# Altium PCB FC_PCB.PcbDoc (part 2 of 2)
Units mm, origin at the board's own origin, x right, y up, seen from the top; angles counter-clockwise.
Board outline 46 x 54 mm, 4 copper layers (Top Layer, GND, 3V3, Bottom Layer), stack 0.603 mm thick; 126 components, 94 nets, 458 pads, 139 vias.
Unrouted connection lines stored in the file: 5.
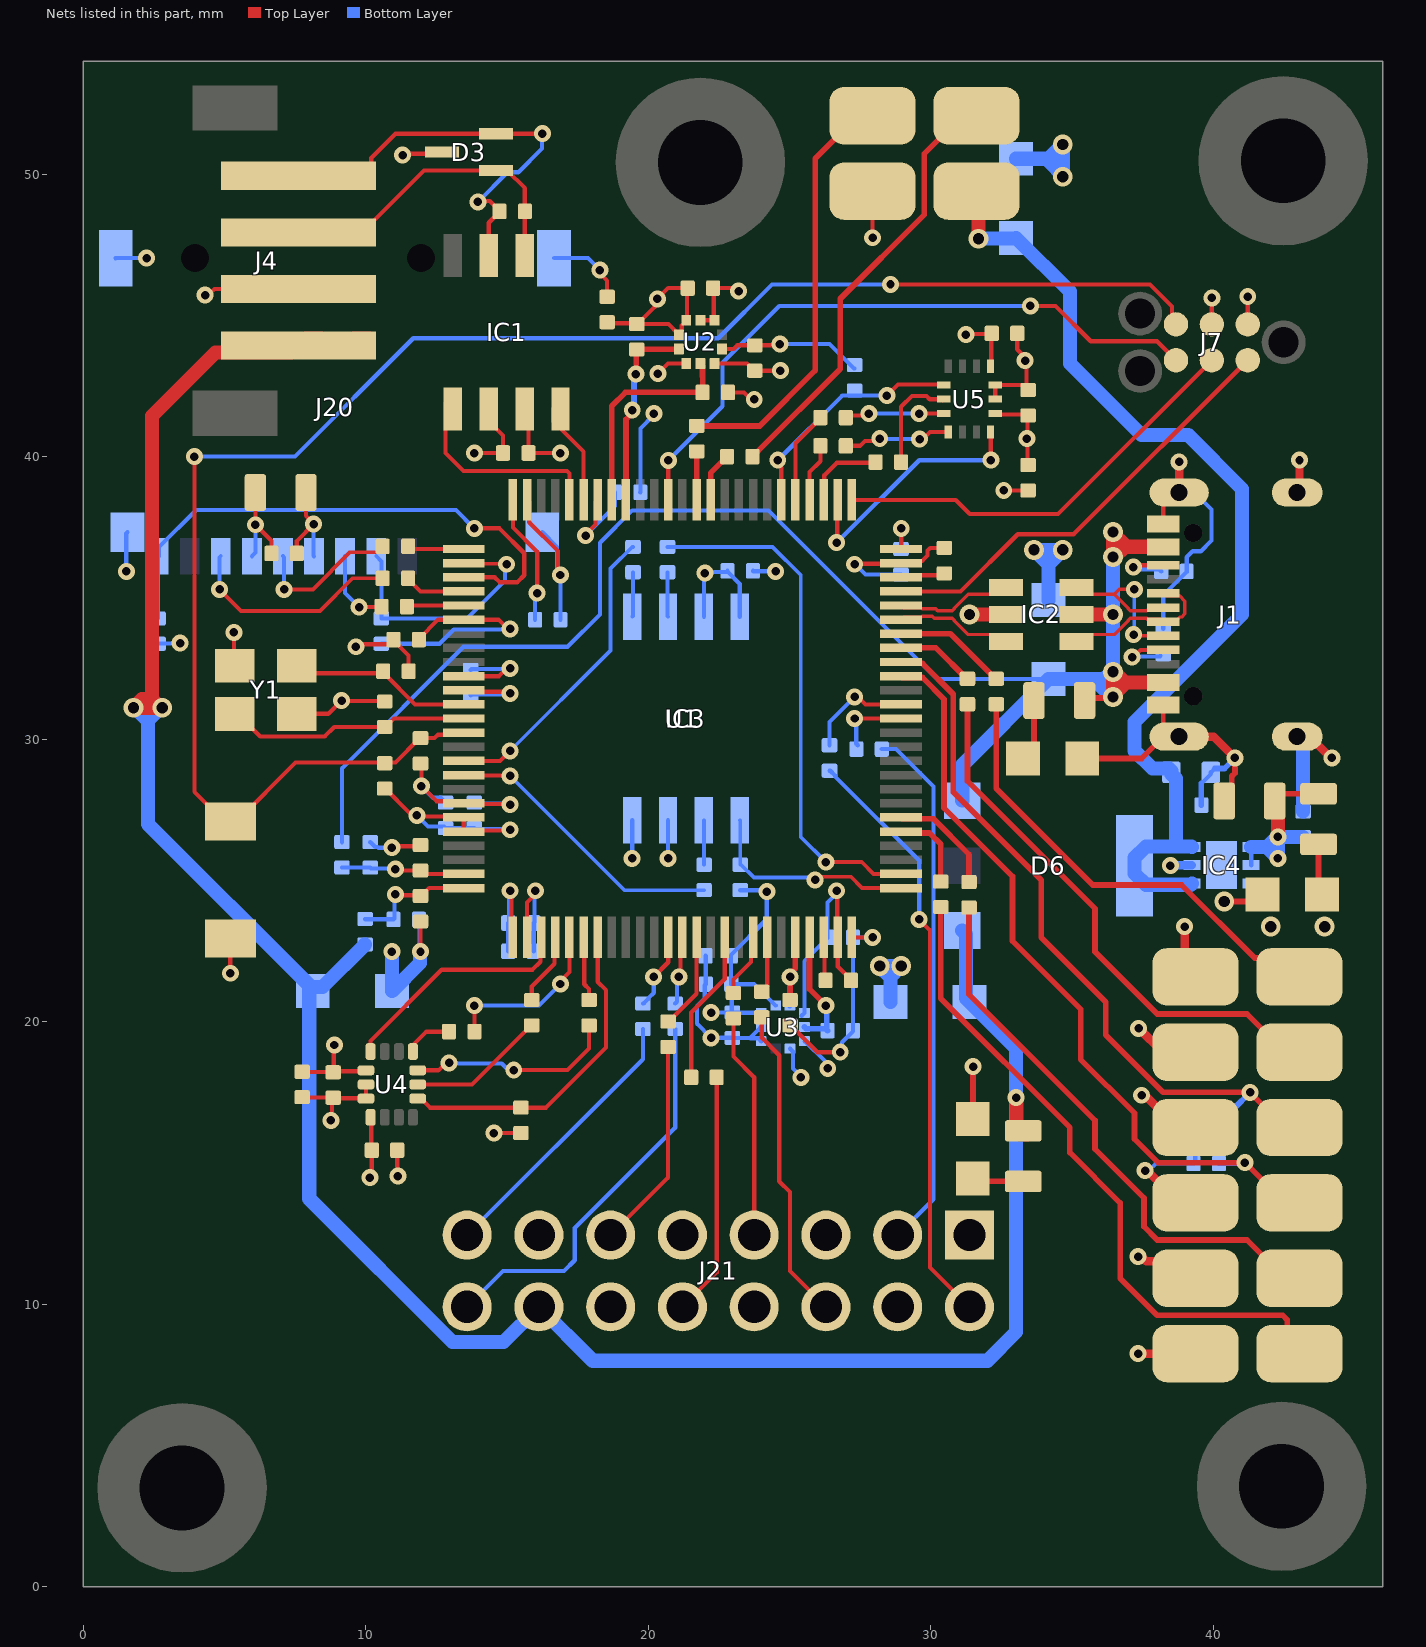
[diagram p4: the nets of this part, all layers, seen from the top]

## Via types
v1: diameter 0.6, hole 0.3, Top Layer to Bottom Layer, 121 vias
v2: diameter 0.7, hole 0.4, Top Layer to Bottom Layer, 18 vias

## Nets (pads, with @x,y where several pads share a name; then routed paths per layer and width w, separated by ;. In a path a pad name is that pad's centre, name@x,y a point inside that pad or via, vN(x,y) a via of type N, cw(c..) or ccw(c..) an arc to the next point about the centre after c; other vN are vias at no path point)
3V3: C1.1 C2.1 C3.1 C6.1 C8.1 C9.1 C11.1 C12.1 C15.1 C16.1 C18.1 C19.1 C20.1 C21.1 C22.1 C23.1 C26.1 C27.1 C28.1 C29.1 C30.1 C31.1 C32.1 C33.1 C34.1 C35.1 C36.1 IC1.3 IC3.3 IC3.7 IC3.8 IC4.1 IC4.2 J7.1 J10.1 J14.1 J15.1 J20.4 R7.1 R16.2 R17.2 R20.1 R21.1 R22.2 R23.2 R27.1 R28.1 R32.2 R33.2 R34.1 R46.1 U1.6 U1.11 U1.20 U1.21 U1.26 U1.50 U1.75 U1.100 U2.1 U2.6 U2.10 U3.1 U3.6 U3.10 U4.5 U4.8 U5.5 U5.8 | length 104.6
  Top Layer w0.15: C23.1@7.562,36.576 7.562,37.02 v1(8.154,37.612) 8.154,37.638 7.885,37.908 C22.1@7.885,38.735 ; C33.1@7.747,18.23 7.757,18.22 8.836,18.22 C31.1@8.845,18.211 C31.1@8.868,18.233 ; v1(8.89,19.177) 8.868,19.155 C31.1@8.868,18.233 ; U4.5@10.007,18.28 9.972,18.245 8.88,18.245 C31.1@8.868,18.233 ; v1(10.145,14.482) 10.214,14.55 C32.1@10.214,15.453 10.193,15.474 10.193,16.594 U4.8@10.172,16.615 ; R7.1@10.668,28.252 10.693,28.252 11.554,27.391 11.725,27.391 v1(11.811,27.305) 11.846,27.27 13.435,27.27 U1.20@13.471,27.234 U1.21@13.471,26.734 13.503,26.766 15.082,26.766 v1(15.113,26.797) ; C9.1@11.88,33.528 11.88,33.553 12.561,34.234 U1.6@13.471,34.234 ; U1.6@13.435,34.198 U1.6@13.471,34.234 ; U1.11@13.471,31.734 13.527,31.678 15.058,31.678 v1(15.113,31.623) ; v1(14.536,16.06) R34.1@15.494,16.06 ; v1(15.113,24.638) 15.161,24.59 15.161,23.044 U1.26@15.209,22.996 ; v1(15.113,33.909) 15.021,33.909 14.696,34.234 U1.6@13.471,34.234 ; U1.100@15.209,38.472 15.209,37.496 16.067,36.638 v1(16.067,35.171) ; IC1.3@15.624,41.697 15.759,41.561 C1.1@15.759,40.132 v1(16.891,40.132) ; C21.1@18.542,44.762 18.575,44.729 19.563,44.729 R23.2@19.595,44.697 R23.2@19.62,44.697 ; U2.6@22.612,43.815 23.025,43.815 23.154,43.944 C19.1@23.775,43.944 24.619,43.944 v1(24.663,43.988) ; R22.2@22.823,42.278 23.385,42.278 23.63,42.033 v1(23.752,42.033) ; R33.2@25.019,19.87 25.044,19.87 25.991,18.923 v1(26.797,18.923) ; U1.50@27.209,22.996 27.218,22.987 v1(27.94,22.987) ; U1.75@28.947,36.734 28.956,36.743 v1(28.956,37.465) ; v1(31.242,44.323) 31.262,44.343 C35.1@32.14,44.343 ; U5.8@32.119,43.199 32.14,43.22 C35.1@32.14,44.343 ; C35.1@32.16,44.364 C35.1@32.14,44.343 ; U5.5@32.282,41.537 32.319,41.499 33.408,41.499 C34.1@33.446,41.461 33.423,41.439 33.423,40.662 v1(33.401,40.64) 33.423,40.618 33.423,39.73 C36.1@33.446,39.708 ; v1(37.589,14.729) v1@37.655,14.729 ; J15.1@38.206,18.923 J15.1@39.37,18.923 ; J14.1@38.795,13.589 J14.1@39.37,13.589 ; J7.1@41.22,44.686 v1(41.22,45.665) ; C26.1@42.291,27.697 C26.1@42.175,27.813 C26.1@42.43,28.068 ; R23.2@19.62,44.697 20.237,45.313 20.237,45.503 v1(20.323,45.589) 20.704,45.97 C20.1@21.397,45.97 21.372,45.945 21.372,44.855 U2.10@21.347,44.83 21.347,44.815 21.182,44.65 21.182,44.415 U2.1@21.082,44.315 21.082,44.33 20.715,44.697 R23.2@19.62,44.697
  Top Layer w0.2: C26.1@42.43,28.068 R20.1@43.727,28.068
  Top Layer w0.3: v1(37.338,8.255) J10.1@39.37,8.255 ; v1(37.361,19.768) J15.1@38.206,18.923 ; v1@37.655,14.729 J14.1@38.795,13.589
  Top Layer w0.5: v1(42.291,26.543) C26.1@42.291,27.697
  Bottom Layer w0.15: R28.1@2.648,33.379 2.659,33.39 3.418,33.39 v1(3.429,33.401) ; v1(8.154,37.612) 8.154,36.496 J20.4@8.169,36.481 ; R27.1@10.554,33.379 12.608,33.379 13.115,33.887 15.091,33.887 v1(15.113,33.909) ; v1(11.811,27.305) 12.205,26.911 12.771,26.911 C11.1@12.827,26.855 C12.1@13.843,26.855 13.872,26.826 15.084,26.826 v1(15.113,26.797) ; C8.1@13.716,31.554 13.751,31.589 15.079,31.589 v1(15.113,31.623) ; C2.1@15.044,22.493 C16.1@15.044,23.495 15.079,23.53 15.079,24.604 v1(15.113,24.638) ; C3.1@15.995,34.229 15.995,35.099 v1(16.067,35.171) ; v1(20.701,25.781) IC3.3@20.701,27.134 ; IC3.7@21.971,34.334 21.971,35.846 v1(22.003,35.878) 22.045,35.919 C18.1@22.763,35.919 ; v1(22.225,20.32) 22.23,20.325 22.974,20.325 C28.1@22.978,20.33 ; C18.1@22.804,35.961 C18.1@22.763,35.919 ; IC3.8@23.241,34.334 23.241,35.499 22.82,35.919 C18.1@22.763,35.919 ; R21.1@23.257,24.657 24.145,24.657 v1(24.196,24.606) 24.196,23.627 22.926,22.358 C30.1@22.926,22.333 22.932,22.327 22.932,21.337 C29.1@22.938,21.331 ; U3.10@24,20.312 23.991,20.321 22.987,20.321 C28.1@22.978,20.33 ; U3.1@24.515,20.577 24.5,20.577 23.746,21.331 C29.1@22.938,21.331 ; v1(24.663,43.988) 26.414,43.988 27.28,43.122 R46.1@27.305,43.122 ; U3.6@25.115,18.947 U3.6@25.015,19.047 25.023,19.047 25.122,18.947 25.122,18.347 25.4,18.069 v1(25.4,18.034) ; v1(26.797,18.923) 26.863,18.989 26.863,19.276 27.247,19.66 C15.1@27.247,22.987 v1(27.94,22.987) ; C6.1@28.947,36.734 28.951,36.738 28.951,37.46 v1(28.956,37.465) ; v1(37.589,14.729) 37.71,14.729 37.968,14.986 R17.2@39.301,14.986 39.365,15.05 39.365,16.7 R16.2@39.428,16.764 ; IC4.2@41.343,25.542 IC4.1@41.343,26.192 ; v1@42.251,26.543 v1(42.291,26.543) ; C29.1@22.938,21.331 22.958,21.311 22.958,20.35 C28.1@22.978,20.33
  Bottom Layer w0.5: IC4.1@41.343,26.192 41.9,26.192 v1@42.251,26.543 ; 41.91,26.162 v1(42.291,25.781) v1(42.291,26.543) C27.1@43.18,26.543
5V: C24.1 C25.2 D1.C D6.4 IC4.4 IC4.6 J3.1 | length 36.3
  Top Layer w0.5: J3.1@31.623,49.403 31.688,49.338 v2(31.688,47.72)
  Bottom Layer w0.5: v2(31.688,47.72) D1.C@32.925,47.72 ; D1.C@33.02,47.749 34.925,45.844 34.925,43.307 37.465,40.767 39.116,40.767 41.021,38.862 41.021,34.419 37.211,30.609 37.211,29.591 37.844,28.958 38.434,28.958 38.515,28.878 C25.2@38.515,28.828 38.515,28.779 38.679,28.614 C24.1@38.679,27.669 38.679,26.275 38.608,26.204 ; IC4.4@39.243,24.892 39.201,24.85 37.613,24.85 37.213,25.25 D6.4@37.213,25.527 37.213,25.804 37.613,26.204 38.608,26.204 ; IC4.6@39.243,26.192 39.231,26.204 38.608,26.204
AP_SCL: R39.1 U4.13 | length 4.9
  Top Layer w0.15: U4.13@11.837,17.78 13.76,17.78 15.85,19.87 R39.1@15.875,19.87
AP_SDA: R40.1 U4.14 | length 7.2
  Top Layer w0.15: U4.14@12.056,18.28 12.57,18.28 12.832,18.542 v1(12.954,18.542) ; v1(15.24,18.288) 17.14,18.288 17.907,19.055 R40.1@17.907,19.87
  Bottom Layer w0.15: v1(12.954,18.542) 12.973,18.523 14.815,18.523 14.964,18.374 15.154,18.374 v1(15.24,18.288)
AP_SDO: R41.1 U4.1 | length 1.5
  Top Layer w0.15: U4.1@11.672,19.177 12.145,19.65 R41.1@12.949,19.65
Baro1_SCL: R23.1 U1.92 U2.2 | length 7
  Top Layer w0.2: U1.92@19.209,38.472 19.212,38.475 19.212,41.322 19.434,41.544 v1(19.434,41.652) ; v1(19.561,42.922) 19.578,42.939 19.578,43.78 R23.1@19.595,43.797 19.605,43.806 21.073,43.806 U2.2@21.082,43.815
  Bottom Layer w0.2: v1(19.434,41.652) 19.497,41.715 19.497,42.858 v1(19.561,42.922)
Baro1_SDA: R22.1 U1.93 U2.4 | length 7.8
  Top Layer w0.2: U1.93@18.709,38.472 18.709,41.799 19.189,42.278 R22.1@21.923,42.278 21.923,42.853 21.922,42.855 21.922,43.228 21.847,43.303 U2.4@21.847,43.3
Baro2_SCL: R33.1 U1.46 U3.2 | length 3.3
  Top Layer w0.2: R33.1@25.019,20.77 v1(25.019,21.59) 25.019,21.698 25.209,21.888 U1.46@25.209,22.996
  Bottom Layer w0.2: U3.2@25.015,20.577 25.017,20.579 25.017,21.588 v1(25.019,21.59)
Baro2_SDA: R32.1 U1.47 U3.4 | length 4.4
  Top Layer w0.2: U1.47@25.709,22.996 25.709,21.154 v1(26.289,20.574)
  Bottom Layer w0.2: U3.4@25.53,19.812 25.593,19.748 26.284,19.748 R32.1@26.318,19.714 ; v1(26.289,20.574) 26.318,20.545 R32.1@26.318,19.714 ; R32.1@26.347,19.685 R32.1@26.318,19.714
BOOT0_R: R3.2 U1.94 | length 3.4
  Top Layer w0.15: v1(17.78,37.211) 17.78,37.245 18.134,37.599 18.134,38.397 U1.94@18.209,38.472
  Bottom Layer w0.15: v1(17.78,37.211) 18.821,38.252 R3.2@18.821,38.744
CAN_RX: IC1.4 U1.95 | length 3.7
  Top Layer w0.15: IC1.4@16.63,41.697 16.63,41.259 17.709,40.18 U1.95@17.709,38.472
CAN_TX: IC1.1 U1.96 | length 7.4
  Top Layer w0.15: IC1.1@12.827,41.91 12.827,40.132 13.462,39.497 17.121,39.497 17.209,39.409 U1.96@17.209,38.472
CANH: D3.2 IC1.7 J4.4 R6.2 | length 15.6
  Top Layer w0.15: J4.4@7.62,49.942 9.768,49.942 10.193,50.367 10.193,50.579 11.049,51.435 v1(16.256,51.435) ; v1(13.97,49.022) 14,49.052 14.39,49.052 14.732,48.71 14.732,48.66 14.354,48.281 IC1.7@14.354,47.121
  Bottom Layer w0.15: v1(13.97,49.022) 15.021,50.073 15.402,50.073 16.239,50.91 16.239,51.418 v1(16.256,51.435)
CANL: D3.1 IC1.6 J4.3 R6.1 | length 11.6
  Top Layer w0.15: J4.3@7.62,47.942 9.87,47.942 12.063,50.135 D3.1@14.605,50.135 15.005,50.135 15.632,49.508 R6.1@15.632,48.685 15.632,47.129 IC1.6@15.624,47.121
CC1: J1.A5 R2.1 | length 2.2
  Top Layer w0.15: v1(37.126,32.908) 37.172,32.908 37.427,33.163 J1.A5@38.227,33.163
  Bottom Layer w0.15: v1(37.126,32.908) 37.15,32.932 38.111,32.932 R2.1@38.134,32.956
CC2: J1.B5 R5.1 | length 2.1
  Top Layer w0.15: v1(37.174,36.091) 37.246,36.163 J1.B5@38.227,36.163
  Bottom Layer w0.15: v1(37.174,36.091) 37.248,36.016 38.083,36.016 R5.1@38.158,35.941
ESC_TEL_RX: R35.2 U1.37 | length 2.7
  Top Layer w0.15: v1(20.193,21.59) 20.709,22.106 U1.37@20.709,22.996
  Bottom Layer w0.15: R35.2@19.812,20.643 19.837,20.643 20.012,20.818 20.012,20.843 20.193,21.024 v1(20.193,21.59)
ESC_TEL_TX: R45.2 U1.38 | length 2.5
  Top Layer w0.15: v1(21.082,21.59) 21.145,21.653 21.145,22.932 U1.38@21.209,22.996
  Bottom Layer w0.15: R45.2@20.955,20.643 21.018,20.706 21.018,21.526 v1(21.082,21.59)
FLASH_CLK: IC3.6 R24.2 | length 1.6
  Bottom Layer w0.135: R24.2@20.682,35.911 20.682,34.353 IC3.6@20.701,34.334
FLASH_CS: IC3.1 R21.2 U1.51 | length 7.7
  Top Layer w0.135: v1(25.908,25.019) 26.034,25.019 26.147,25.132 27.172,25.132 27.57,24.734 U1.51@28.947,24.734
  Bottom Layer w0.135: IC3.1@23.241,27.134 23.257,27.118 R21.2@23.257,25.557 23.282,25.557 23.738,25.101 25.826,25.101 v1(25.908,25.019)
FLASH_DI: IC3.5 R26.2 | length 1.6
  Bottom Layer w0.135: IC3.5@19.431,34.334 19.461,34.364 R26.2@19.461,35.911
FLASH_DO: IC3.2 R25.1 | length 1.6
  Bottom Layer w0.135: IC3.2@21.971,27.134 21.976,27.129 R25.1@21.976,25.557
FLASH_MISO: R25.2 U1.17 | length 10.2
  Top Layer w0.135: U1.17@13.471,28.734 13.487,28.718 15.097,28.718 v1(15.113,28.702)
  Bottom Layer w0.135: v1(15.113,28.702) 19.158,24.657 R25.2@21.976,24.657
FLASH_MOSI: R26.1 U1.16 | length 10.8
  Top Layer w0.135: U1.16@13.471,29.234 14.756,29.234 v1(15.113,29.591)
  Bottom Layer w0.135: v1(15.113,29.591) 18.669,33.147 18.669,36.044 19.436,36.811 R26.1@19.461,36.811
FLASH_SCK: R24.1 U1.52 | length 18.5
  Top Layer w0.135: v1(26.289,25.654) 27.557,25.654 27.977,25.234 U1.52@28.947,25.234
  Bottom Layer w0.135: R24.1@20.682,36.811 24.403,36.811 25.4,35.814 25.4,26.543 v1(26.289,25.654)
GND: C1.2 C2.2 C3.2 C4.2 C5.2 C6.2 C7.2 C8.2 C9.2 C10.2 C11.2 C12.2 C13.2 C14.2 C15.2 C16.2 C17.2 C18.2 C19.2 C20.2 C21.2 C22.2 C23.2 C24.2 C25.1 C26.2 C27.2 C28.2 C29.2 C30.2 C31.2 C32.2 C33.2 C34.2 C35.2 C36.2 D1.A D2.A D3.3 D4.A D5.A DS1.2 DS2.2 DS3.2 IC1.2 IC2.2 IC3.4 IC4.3 IC4.5 IC4.7 J1.A1_B12 J1.B1_A12 J1.SH1 J1.SH2 J1.SH3 J1.SH4 J4.2 J6.1 J7.3 J13.1 J16.1 J17.1 J20.6 J20.MP1 J20.MP2 J20.MP3 J20.MP4 J21.1 J21.4 J21.5 J21.8 J21.9 J21.12 J21.13 R2.2 R3.1 R5.2 R14.2 R15.2 S1.2 U1.10 U1.19 U1.27 U1.49 U1.74 U1.99 U2.3 U2.5 U2.8 U2.9 U3.3 U3.5 U3.8 U3.9 U4.6 U4.7 U5.6 U5.7 Y1.2 Y1.4 | length 147.3
  Top Layer w0.15: v1(4.318,45.72) 4.423,45.72 4.645,45.942 J4.2@7.62,45.942 ; v1(5.207,21.717) S1.2@5.207,22.944 ; v1(5.334,33.782) 5.334,32.631 Y1.2@5.365,32.6 ; C22.2@6.095,38.735 C22.2@6.095,38.735 v1(6.096,37.592) 6.662,37.026 C23.2@6.662,36.576 ; Y1.4@7.565,30.9 8.675,30.9 v1(9.144,31.369) 9.16,31.353 10.659,31.353 C4.2@10.675,31.336 ; C33.2@7.747,17.33 7.757,17.32 8.836,17.32 C31.2@8.845,17.311 ; v1(8.763,16.51) 8.804,16.551 8.804,17.27 C31.2@8.845,17.311 ; v1(9.652,33.274) 9.738,33.36 10.812,33.36 C9.2@10.98,33.528 10.98,33.503 11.516,32.967 C5.2@11.516,32.408 ; U4.7@10.007,17.28 U4.7@9.992,17.295 ; U4.6@10.007,17.78 10.007,17.311 U4.7@9.992,17.295 ; v1(10.922,26.162) 10.968,26.208 11.892,26.208 R14.2@11.938,26.255 ; C32.2@11.114,15.453 11.114,14.557 v1(11.135,14.535) ; v1(11.303,50.673) 11.359,50.729 12.649,50.729 D3.3@12.705,50.785 ; v1(11.938,22.479) R15.2@11.938,23.553 ; C10.2@11.938,29.141 11.972,29.107 v1(11.972,28.341) 12.504,27.809 13.396,27.809 U1.19@13.471,27.734 13.495,27.71 15.089,27.71 v1(15.113,27.686) ; U1.10@13.457,32.248 U1.10@13.471,32.234 14.713,32.234 14.991,32.512 v1(15.113,32.512) ; v1(13.843,40.132) C1.2@14.859,40.132 14.859,40.754 14.354,41.259 IC1.2@14.354,41.697 ; U1.27@15.709,22.996 15.709,24.223 16.002,24.516 v1(16.002,24.638) ; U1.99@15.709,38.472 15.784,38.397 15.784,37.683 16.805,36.662 16.805,35.9 v1(16.891,35.814) ; v1(18.288,46.609) 18.288,46.487 18.542,46.233 C21.2@18.542,45.662 ; v1(20.345,42.941) 20.703,43.3 U2.3@21.347,43.3 ; U2.9@21.847,44.83 U2.8@22.347,44.83 22.322,44.855 22.322,45.945 C20.2@22.297,45.97 23.089,45.97 v1(23.196,45.863) ; U2.5@22.347,43.3 23.494,43.3 23.75,43.044 C19.2@23.775,43.044 24.67,43.044 v1(24.676,43.051) ; v1(26.355,18.346) v1@26.416,18.285 ; v1(26.67,24.638) 26.689,24.619 26.689,23.015 U1.49@26.709,22.996 26.709,21.957 27.178,21.488 C17.2@27.178,21.463 ; v1(27.305,36.195) 27.324,36.214 28.928,36.214 U1.74@28.947,36.234 29.022,36.309 29.695,36.309 29.887,36.5 29.887,36.679 29.98,36.772 C7.2@30.48,36.772 ; v1(27.94,47.752) J6.1@27.94,49.403 ; DS2.2@31.487,16.552 DS2.2@31.496,16.561 ; U5.6@32.282,42.037 U5.7@32.282,42.537 33.245,42.537 33.421,42.361 C34.2@33.446,42.361 33.392,42.415 33.392,43.348 v1(33.337,43.402) 33.337,43.524 33.06,43.801 C35.2@33.06,44.364 ; v1(32.585,38.808) C36.2@33.446,38.808 ; v1(37.465,17.399) v1@37.587,17.399 ; J13.1@37.954,11.596 38.628,10.922 J13.1@39.37,10.922 ; J1.A1_B12@38.227,31.213 38.227,30.486 J1.SH3@38.62,30.093 ; J1.B1_A12@38.227,37.613 38.227,38.34 38.62,38.733 J1.SH4@38.792,38.733 ; J1.SH3@38.242,30.093 J1.SH3@38.62,30.093 ; J16.1@38.73,16.256 J16.1@39.37,16.256 ; J1.SH3@38.792,30.093 J1.SH3@38.62,30.093 ; J17.1@38.989,21.971 J17.1@39.37,21.59 39.44,21.59 J17.1@40.348,22.498 ; J7.3@39.95,44.686 v1(39.95,45.624) ; C26.2@40.385,27.813 C26.2@40.653,28.081 ; DS3.2@41.495,24.257 DS3.2@41.749,24.511 ; J1.SH1@42.972,30.093 J1.SH1@43.406,30.093 ; J1.SH2@42.972,38.733 J1.SH2@43.053,38.814 ; v1@44.162,29.337 v1(44.196,29.337) ; C31.2@8.845,17.311 8.861,17.295 U4.7@9.992,17.295
  Top Layer w0.2: DS2.2@31.496,16.561 v1(31.496,18.415) ; DS1.2@35.361,29.317 37.466,29.317 J1.SH3@38.242,30.093 ; v2(40.386,24.257) DS3.2@41.495,24.257 ; C26.2@40.653,28.081 40.653,28.688 40.767,28.802 v1(40.767,29.337)
  Top Layer w0.3: v1(37.338,11.684) 37.46,11.684 37.621,11.523 J13.1@37.954,11.523 ; v1@37.587,17.399 J16.1@38.73,16.256 ; J1.SH3@38.792,30.093 40.011,30.093 v1(40.767,29.337) ; J1.SH4@38.792,38.733 v1(38.792,39.821) ; J17.1@38.989,22.225 v1(38.989,23.368) ; J1.SH2@43.053,38.814 v1(43.053,39.878) ; J1.SH1@43.406,30.093 v1@44.162,29.337
  Top Layer w0.5: v2(31.369,34.417) IC2.2@32.659,34.417
  Bottom Layer w0.15: J20.MP2@1.143,47.025 J20.MP2@1.149,47.031 v1(2.245,47.031) ; v1(1.524,35.941) 1.524,37.286 J20.MP1@1.569,37.331 ; J20.6@5.969,36.481 6.096,36.608 v1(6.096,37.592) ; C14.2@10.16,26.358 10.335,26.183 10.427,26.183 10.448,26.162 v1(10.922,26.162) ; C13.2@11.88,23.622 11.909,23.593 11.909,22.508 v1(11.938,22.479) ; v1(11.972,28.341) 12.383,27.93 12.652,27.93 C11.2@12.827,27.755 C12.2@13.843,27.755 13.877,27.721 15.078,27.721 v1(15.113,27.686) ; C8.2@13.716,32.454 13.745,32.483 15.084,32.483 v1(15.113,32.512) ; C2.2@15.944,22.493 C16.2@15.944,23.495 15.973,23.524 15.973,24.609 v1(16.002,24.638) ; J20.MP4@16.249,37.331 16.774,36.806 16.774,36.052 16.891,35.936 v1(16.891,35.814) 16.893,35.812 16.893,34.232 C3.2@16.895,34.229 ; J20.MP3@16.669,47.031 17.866,47.031 v1(18.288,46.609) ; v1(19.431,25.781) IC3.4@19.431,27.134 ; R3.1@19.721,38.744 19.724,38.747 19.724,41.001 20.196,41.473 v1(20.196,41.525) ; C30.2@22.026,22.333 22.032,22.327 C29.2@22.032,21.325 ; C29.2@22.038,21.331 C29.2@22.032,21.325 ; v1(22.225,19.431) 21.723,19.933 21.723,20.552 22.003,20.831 22.003,21.296 C29.2@22.032,21.325 ; v1(22.225,19.431) 22.978,19.43 23.603,19.43 ; C18.2@23.704,35.961 23.714,35.951 24.501,35.951 v1(24.511,35.941) ; U3.8@24,19.312 23.9,19.412 23.62,19.412 23.603,19.43 ; U3.9@24,19.812 23.985,19.812 23.603,19.43 ; U3.3@25.43,20.212 U3.3@25.53,20.312 25.53,22.145 26.347,22.962 C15.2@26.347,22.987 26.347,24.219 26.67,24.542 v1(26.67,24.638) ; U3.5@25.53,19.312 25.545,19.312 26.269,18.588 26.269,18.432 v1(26.355,18.346) ; v1(27.305,36.195) 27.325,36.195 27.686,35.834 C6.2@28.947,35.834 ; v2@28.194,21.945 v2(28.194,21.971) ; v2@28.95,21.971 v2(28.956,21.971) ; D1.A@33.02,50.549 D1.A@33.023,50.546 ; R2.2@38.227,33.909 38.227,35.085 39.058,35.916 R5.2@39.058,35.941 39.058,36.441 39.27,36.653 39.561,36.653 39.942,37.034 39.942,38.133 39.342,38.733 J1.SH4@38.792,38.733 ; v1(38.481,25.527) v1@38.489,25.535 ; J1.SH3@38.792,30.093 J1.SH3@39.342,30.093 ; IC4.5@39.235,25.535 IC4.5@39.243,25.542 ; 39.579,28.439 39.915,28.775 C25.1@39.915,28.828 C25.1@40.052,28.966 ; J1.SH1@42.972,30.093 J1.SH1@43.18,29.885
  Bottom Layer w0.2: C24.2@39.579,27.669 39.579,28.439 ; C25.1@40.052,28.966 40.396,28.966 v1(40.767,29.337)
  Bottom Layer w0.3: 34.163,50.546 34.182,50.546 ; v1@38.489,25.535 IC4.5@39.235,25.535
  Bottom Layer w0.5: v1(10.925,22.482) D2.A@10.925,21.082 11.919,22.076 11.919,22.46 v1(11.938,22.479) ; v2@28.194,21.945 28.572,21.567 D5.A@28.572,20.701 ; v2(28.194,21.971) 28.95,21.971 28.572,21.593 ; D1.A@33.023,50.546 34.163,50.546 v2(34.671,51.054) v2@34.671,50.057 ; D4.A@34.163,34.931 34.163,36.195 ; 34.182,50.546 34.182,50.454 34.671,49.965 v2(34.671,49.911) ; C27.2@43.18,27.443 J1.SH1@43.18,29.885 ; 34.163,36.195 v2(34.671,36.703) v2(33.655,36.703) 34.163,36.195
  other v2: 42.037,23.368 43.942,23.368
GPS_RX: R9.1 U1.56 | length 3.9
  Top Layer w0.2: U1.56@28.947,27.234 28.997,27.184 30.093,27.184 31.355,25.922 R9.1@31.355,24.945
GPS_RX_PAD: J9.1 R9.2 | length 20.1
  Top Layer w0.2: R9.2@31.355,24.045 31.355,20.969 35.814,16.51 35.814,15.494 37.546,13.762 37.546,12.746 38.019,12.273 41.194,12.273 42.545,10.922 J9.1@43.053,10.922
GPS_TX: R11.1 U1.55 | length 2.9
  Top Layer w0.2: U1.55@28.947,26.734 28.997,26.684 29.958,26.684 30.353,26.289 R11.1@30.353,24.961
GPS_TX_PAD: J12.1 R11.2 | length 23.7
  Top Layer w0.2: R11.2@30.353,24.061 30.353,20.828 34.925,16.256 34.925,15.367 36.703,13.589 36.703,10.922 38.019,9.606 42.464,9.606 42.616,9.454 42.616,8.692 J12.1@43.053,8.255
HSE_IN: C5.1 U1.12 Y1.1 | length 6.5
  Top Layer w0.15: Y1.1@7.565,32.6 7.827,32.338 10.616,32.338 10.641,32.338 11.745,31.234 U1.12@13.471,31.234
HSE_OUT: C4.1 U1.13 Y1.3 | length 8.7
  Top Layer w0.15: Y1.3@5.365,30.9 5.465,30.9 6.267,30.098 8.546,30.098 8.885,30.436 C4.1@10.675,30.436 10.7,30.436 10.998,30.734 U1.13@13.471,30.734
I2C3_SCL: J18.1 R16.1 U1.67 | length 26.1
  Top Layer w0.2: U1.67@28.947,32.734 28.997,32.684 29.706,32.684 30.798,31.591 30.798,28.13 33.909,25.019 33.909,22.987 36.195,20.701 36.195,19.535 38.231,17.499 v1(41.302,17.499) 42.545,16.256 J18.1@43.053,16.256
  Bottom Layer w0.2: R16.1@40.328,16.764 40.328,16.789 40.478,16.939 40.742,16.939 v1(41.302,17.499)
I2C3_SDA: J19.1 R17.1 U1.66 | length 28
  Top Layer w0.2: U1.66@28.947,32.234 28.997,32.184 29.706,32.184 30.471,31.418 30.471,27.568 32.893,25.146 32.893,22.86 35.306,20.447 35.306,18.669 37.211,16.764 37.211,15.852 38.05,15.013 v1(41.121,15.013) 42.545,13.589 J19.1@43.053,13.589
  Bottom Layer w0.2: R17.1@40.201,14.986 40.214,15 41.107,15 v1(41.121,15.013) v1@41.169,14.965
IMU1_CS: R34.2 U1.32 U4.12 | length 11.7
  Top Layer w0.15: U4.12@11.837,17.28 11.957,17.28 12.277,16.96 R34.2@15.494,16.96 16.378,16.96 18.507,19.089 18.507,21.118 18.209,21.416 U1.32@18.209,22.996
IMU1_INT: U1.28 U4.4 | length 8.4
  Top Layer w0.15: U4.4@10.172,18.945 10.172,19.323 12.693,21.844 15.904,21.844 16.184,22.124 16.184,22.971 U1.28@16.209,22.996
IMU1_MISO: R41.2 U1.30 | length 6.1
  Top Layer w0.15: v1(13.843,20.574) 13.846,20.571 13.846,19.653 R41.2@13.849,19.65 ; v1(16.891,21.336) 16.891,21.442 17.209,21.76 U1.30@17.209,22.996
  Bottom Layer w0.15: v1(13.843,20.574) 16.129,20.574 v1(16.891,21.336)
IMU1_MOSI: R40.2 U1.31 | length 2.3
  Top Layer w0.15: U1.31@17.709,22.996 17.734,22.971 17.734,21.325 17.902,21.157 17.902,20.775 R40.2@17.907,20.77
IMU1_SCK: R39.2 U1.29 | length 2.6
  Top Layer w0.15: R39.2@15.875,20.77 15.875,21.245 16.684,22.054 16.684,22.971 U1.29@16.709,22.996
IMU2_CS: R46.2 U1.81 U5.12 | length 8.4
  Top Layer w0.15: v1(24.584,39.878) 24.584,39.756 24.709,39.631 U1.81@24.709,38.472 ; v1(28.448,42.164) 28.837,42.553 29.165,42.553 29.166,42.554 30.016,42.554 30.017,42.553 30.441,42.553 U5.12@30.456,42.537
  Bottom Layer w0.15: v1(24.584,39.878) 26.87,42.164 v1(28.448,42.164)
IMU2_INT: U1.77 U5.4 | length 9.2
  Top Layer w0.15: v1(26.67,36.957) 26.689,36.976 26.689,38.453 U1.77@26.709,38.472 ; U5.4@32.119,40.875 32.125,40.869 32.125,39.884 v1(32.131,39.878)
  Bottom Layer w0.15: v1(26.67,36.957) 29.591,39.878 v1(32.131,39.878)
IMU2_MISO: R49.2 U1.79 | length 2.1
  Top Layer w0.15: U1.79@25.709,38.472 25.709,39.456 26.093,39.84 R49.2@26.093,40.386
IMU2_MOSI: R48.2 U1.80 | length 3.3
  Top Layer w0.15: U1.80@25.209,38.472 25.209,40.479 26.093,41.363 R48.2@26.093,41.388
IMU2_SCK: R47.2 U1.78 | length 2.9
  Top Layer w0.15: U1.78@26.209,38.472 26.234,38.497 26.234,39.344 26.676,39.786 28.02,39.786 R47.2@28.045,39.811
NetDS1_1: DS1.1 R18.2 | length 2.2
  Top Layer w0.15: DS1.1@33.261,29.317 DS1.1@33.654,29.709
  Top Layer w0.2: DS1.1@33.654,29.709 R18.2@33.654,31.369
NetDS2_1: DS2.1 R19.2 | length 1.8
  Top Layer w0.15: DS2.1@31.487,14.452 DS2.1@31.589,14.35
  Top Layer w0.2: DS2.1@31.589,14.35 R19.2@33.274,14.35
NetDS3_1: DS3.1 R20.2 | length 1.8
  Top Layer w0.15: DS3.1@43.727,24.633 DS3.1@43.849,24.511
  Top Layer w0.2: DS3.1@43.727,24.633 R20.2@43.727,26.278
NetJ21_2: J21.2 R44.1 | length 21
  Top Layer w0.15: v1(29.591,23.622) 29.978,23.235 29.978,11.3 J21.2@31.369,9.909
  Bottom Layer w0.15: R44.1@26.416,28.887 26.441,28.887 26.616,28.712 26.616,28.687 29.591,25.712 v1(29.591,23.622)
NetJ21_3: J21.3 R38.1 | length 18.8
  Bottom Layer w0.15: R38.1@28.268,29.651 28.762,29.651 28.767,29.656 30.099,28.324 30.099,13.719 J21.3@28.829,12.449
NetJ21_6: J21.6 R43.1 | length 11.2
  Top Layer w0.15: R43.1@24.017,20.16 24.017,19.436 24.638,18.816 24.638,14.351 25.019,13.97 25.019,11.179 J21.6@26.289,9.909
NetJ21_7: J21.7 R37.1 | length 8
  Top Layer w0.15: R37.1@23.016,20.12 23.016,18.767 23.749,18.034 J21.7@23.749,12.449
NetJ21_10: J21.10 R42.1 | length 8.6
  Top Layer w0.15: J21.10@21.209,9.909 22.421,11.121 R42.1@22.421,18.034
NetJ21_11: J21.11 R36.1 | length 7.5
  Top Layer w0.15: J21.11@18.669,12.449 20.701,14.481 R36.1@20.701,19.108
NetJ21_15: J21.15 R35.1 | length 9.9
  Bottom Layer w0.15: J21.15@13.589,12.449 19.812,18.672 R35.1@19.812,19.743
NetJ21_16: J21.16 R45.1 | length 14.2
  Bottom Layer w0.15: J21.16@13.589,9.909 14.856,11.176 17.018,11.176 17.399,11.557 17.399,12.695 20.955,16.251 R45.1@20.955,19.743
NRST: C10.1 J7.5 R7.2 S1.1 U1.14 | length 61.6
  Top Layer w0.15: v1(3.937,40.005) 3.937,28.139 4.982,27.094 S1.1@5.207,27.094 5.432,27.094 7.515,29.177 11.049,29.177 11.913,30.041 C10.1@11.938,30.041 12.438,30.041 12.556,30.159 13.396,30.159 U1.14@13.471,30.234 ; v1(28.575,46.101) 37.758,46.101 38.544,45.315 38.544,44.823 J7.5@38.68,44.686 J7.5@38.387,44.686
  Bottom Layer w0.15: v1(3.937,40.005) 7.493,40.005 11.684,44.196 22.479,44.196 24.384,46.101 v1(28.575,46.101)
RC_RX: R1.1 U1.87 | length 1.7
  Top Layer w0.2: U1.87@21.709,38.472 21.713,38.476 21.713,40.186 R1.1@21.717,40.19
RC_RX_PAD: J2.1 R1.2 | length 15.2
  Top Layer w0.2: R1.2@21.717,41.09 23.945,41.09 25.908,43.053 25.908,50.546 27.432,52.07 J2.1@27.94,52.07
RC_TX: R4.1 U1.86 | length 1.8
  Top Layer w0.2: U1.86@22.209,38.472 22.209,39.423 22.616,39.83 22.641,39.83 22.791,39.98 R4.1@22.791,40.005
RC_TX_PAD: J5.1 R4.2 | length 15.7
  Top Layer w0.2: R4.2@23.691,40.005 23.691,40.03 23.841,40.18 23.866,40.18 26.797,43.111 26.797,45.593 29.764,48.56 29.764,50.719 31.115,52.07 J5.1@31.623,52.07
SC_SENSE: J20.CD1 R28.2 U1.3 | length 19.7
  Top Layer w0.15: U1.3@13.471,35.734 14.563,35.734 14.737,35.56 15.367,35.56 15.611,35.804 15.611,36.586 14.732,37.465 v1(13.843,37.465)
  Bottom Layer w0.15: R28.2@2.648,34.279 2.648,36.459 J20.CD1@2.669,36.481 2.669,36.781 4.002,38.114 13.194,38.114 v1(13.843,37.465)
SCX: R47.1 U5.13 | length 3.7
  Top Layer w0.15: R47.1@28.945,39.811 28.945,41.767 29.332,42.154 29.85,42.154 29.967,42.037 30.357,42.037 30.407,41.987 U5.13@30.456,42.037
SD_CS: J20.2 R27.2 U1.2 | length 9.3
  Top Layer w0.135: U1.2@13.471,36.234 13.49,36.214 14.967,36.214 v1(14.986,36.195)
  Bottom Layer w0.135: J20.2@10.369,36.481 10.554,36.297 R27.2@10.554,34.279 13.578,34.279 14.924,35.625 14.924,36.133 v1(14.986,36.195)
SD_MISO: R31.2 U1.4 | length 2.2
  Top Layer w0.135: R31.2@11.5,35.697 11.5,35.672 11.937,35.234 U1.4@13.471,35.234
SD_MOSI: R29.2 U1.5 | length 2
  Top Layer w0.135: R29.2@11.456,34.695 11.494,34.734 U1.5@13.471,34.734
SD_SCK: R30.2 U1.1 | length 2
  Top Layer w0.135: R30.2@11.499,36.83 11.595,36.734 U1.1@13.471,36.734
SDO: R49.1 U5.1 | length 4
  Top Layer w0.15: R49.1@26.993,40.386 27.493,40.386 27.669,40.562 28.116,40.562 v1(28.194,40.64) ; v1(29.606,40.625) 29.728,40.625 29.978,40.875 U5.1@30.619,40.875 U5.1@30.619,40.762
  Bottom Layer w0.15: v1(28.194,40.64) 28.202,40.632 29.599,40.632 v1(29.606,40.625)
SDX: R48.1 U5.14 | length 3.5
  Top Layer w0.15: R48.1@26.993,41.388 27.064,41.458 27.742,41.458 v1(27.813,41.529) ; v1(29.591,41.529) 29.595,41.533 30.452,41.533 U5.14@30.456,41.537
  Bottom Layer w0.15: v1(27.813,41.529) v1(29.591,41.529)
STM_D_N: IC2.1 U1.71 | length 4.4
  Top Layer w0.12: U1.71@28.947,34.734 29.037,34.644 29.67,34.644 29.695,34.619 30.172,34.619 30.239,34.552 30.762,34.552 30.832,34.622 30.832,34.639 31.32,35.127 32.419,35.127 IC2.1@32.659,35.367 IC2.1@32.359,35.367
STM_D_P: IC2.3 U1.70 | length 4.1
  Top Layer w0.12: U1.70@28.947,34.234 29.037,34.324 29.67,34.324 29.695,34.349 30.06,34.349 30.127,34.282 30.762,34.282 30.832,34.212 30.832,34.195 31.32,33.707 32.419,33.707 IC2.3@32.659,33.467
SWCLK: J7.4 U1.76 | length 15.2
  Top Layer w0.15: U1.76@27.209,38.472 30.882,38.472 31.381,37.973 34.507,37.973 J7.4@39.95,43.416
SWDIO: J7.2 U1.72 | length 15.7
  Top Layer w0.15: U1.72@28.947,35.234 31.056,35.234 33.077,37.255 35.059,37.255 J7.2@41.22,43.416
SWO: J7.6 U1.89 | length 23.3
  Top Layer w0.15: U1.89@20.709,38.472 v1(20.709,39.87) ; v1(33.528,45.339) 34.417,45.339 35.666,44.09 38.006,44.09 J7.6@38.68,43.416
  Bottom Layer w0.15: v1(20.709,39.87) 22.625,41.786 22.625,43.326 24.638,45.339 v1(33.528,45.339)
T1-1: R36.2 U1.39 | length 3.4
  Top Layer w0.15: R36.2@20.701,20.008 20.726,20.008 21.709,20.991 U1.39@21.709,22.996
T1-2: R42.2 U1.41 | length 5.5
  Top Layer w0.15: R42.2@21.521,18.034 21.521,20.326 22.709,21.514 U1.41@22.709,22.996
T1-3: R37.2 U1.43 | length 2.3
  Top Layer w0.15: R37.2@23.016,21.02 23.016,21.495 23.634,22.113 23.634,22.921 U1.43@23.709,22.996
T1-4: R43.2 U1.44 | length 2
  Top Layer w0.15: R43.2@24.017,21.06 24.034,21.06 24.209,21.235 U1.44@24.209,22.996
T8-1: R38.2 U1.63 | length 2.6
  Top Layer w0.15: v1(27.305,30.734) U1.63@28.947,30.734
  Bottom Layer w0.15: v1(27.305,30.734) 27.361,30.678 27.361,29.843 R38.2@27.418,29.787
T8-2: R44.2 U1.64 | length 3.8
  Top Layer w0.15: v1(27.305,31.496) 27.427,31.496 27.689,31.234 U1.64@28.947,31.234
  Bottom Layer w0.15: R44.2@26.416,29.787 26.416,30.607 v1(27.305,31.496)
TEL_RX: R8.2 U1.69 | length 4
  Top Layer w0.2: U1.69@28.947,33.734 30.698,33.734 32.291,32.14 R8.2@32.316,32.14
TEL_RX_C: J8.1 R8.1 | length 19
  Top Layer w0.2: R8.1@32.316,31.24 32.316,28.263 35.736,24.843 38.881,24.843 41.47,22.254 42.897,22.254 43.561,21.59 42.237,22.406 J8.1@41.762,22.406
TEL_TX: R10.2 U1.68 | length 2.8
  Top Layer w0.2: U1.68@28.947,33.234 30.182,33.234 31.275,32.14 R10.2@31.3,32.14
TEL_TX_C: J11.1 R10.1 | length 19.3
  Top Layer w0.2: R10.1@31.3,31.24 31.3,28.517 35.814,24.003 35.814,22.479 38.019,20.274 41.194,20.274 42.545,18.923 J11.1@43.053,18.923
TF-IN: J20.3 R29.1 | length 2.8
  Top Layer w0.135: v1(9.765,34.676) 10.536,34.676 R29.1@10.556,34.695
  Bottom Layer w0.135: J20.3@9.269,36.481 9.269,35.172 v1(9.765,34.676)
TF-OUT: J20.7 R31.1 | length 7.8
  Top Layer w0.135: v1(4.826,35.306) 5.588,34.544 8.382,34.544 9.535,35.697 R31.1@10.6,35.697
  Bottom Layer w0.135: v1(4.826,35.306) 4.826,36.438 J20.7@4.869,36.481
TF-SCK: J20.5 R30.1 | length 5.3
  Top Layer w0.135: v1(7.112,35.306) 8.128,35.306 9.444,36.622 10.417,36.622 10.599,36.805 R30.1@10.599,36.83
  Bottom Layer w0.135: J20.5@7.069,36.481 7.112,36.438 v1(7.112,35.306)
USB_D_N: IC2.6 J1.A7 J1.B7 | length 6.9
  Top Layer w0.12: IC2.6@35.159,35.367 35.399,35.127 36.498,35.127 ; v1(37.184,33.703) 37.225,33.663 J1.B7@38.227,33.663 ; v1(37.211,35.306) 36.677,35.306 36.498,35.127 ; J1.A7@38.227,34.663 38.137,34.573 37.667,34.573 37.642,34.548 37.353,34.548 37.349,34.552 37.056,34.552 36.986,34.622 36.986,34.639 36.498,35.127
  Bottom Layer w0.12: v1(37.184,33.703) 37.198,33.716 37.198,35.293 v1(37.211,35.306)
USB_D_P: IC2.4 J1.A6 J1.B6 | length 5.7
  Top Layer w0.12: IC2.4@35.159,33.467 35.399,33.707 36.498,33.707 36.986,34.195 36.986,34.212 37.056,34.282 37.237,34.282 37.241,34.278 37.642,34.278 37.667,34.253 38.137,34.253 J1.A6@38.227,34.163 38.652,34.163 38.815,34.326 38.879,34.326 38.989,34.436 38.989,34.89 38.806,35.073 38.317,35.073 J1.B6@38.227,35.163
VBAT: D2.C D5.C D6.1 J4.1 J21.14 R13.1 R19.1 | length 91.1
  Top Layer w0.5: v2(2.794,31.115) v2@2.74,31.115 ; J4.1@8.81,43.815 8.433,44.192 7.87,44.192 7.37,43.692 4.687,43.692 2.439,41.444 2.439,31.416 ; J4.1@9.18,43.815 9.557,44.192 10.12,44.192 J4.1@9.87,43.942 ; v1(33.02,17.312) 33.039,17.293 33.039,16.143 33.169,16.013 R19.1@33.401,16.013 ; 2.439,31.416 v2@2.74,31.115 ; 2.439,31.416 2.079,31.416 v2(1.778,31.115) v2@2.74,31.115
  Bottom Layer w0.5: v2(1.778,31.115) v2@1.832,31.115 ; v2@2.794,31.061 v2(2.794,31.115) v2@2.74,31.115 ; R13.1@9.978,22.734 9.953,22.734 9.953,22.709 8.475,21.23 8.06,21.23 D2.C@8.001,21.29 ; D6.1@31.113,23.227 31.243,23.098 31.243,20.83 D5.C@31.372,20.701 33.02,19.053 v1(33.02,17.312) 33.02,9.017 32.004,8.001 18.037,8.001 J21.14@16.129,9.909 14.882,8.662 13.072,8.662 8.001,13.733 D2.C@8.001,21.29 ; v2@1.832,31.115 v2@2.74,31.115 ; v2@1.832,31.115 2.231,30.716 2.286,30.716 ; 2.286,30.716 2.341,30.716 v2@2.74,31.115 ; 2.286,30.716 2.286,27.005 D2.C@8.001,21.29
VBAT_ADC: C13.1 R13.2 R15.1 U1.25 | length 4.4
  Top Layer w0.15: v1@11.078,24.482 11.909,24.482 R15.1@11.938,24.453 11.963,24.453 12.244,24.734 U1.25@13.471,24.734
  Bottom Layer w0.15: R13.2@9.978,23.634 9.985,23.628 10.974,23.628 C13.1@10.98,23.622 11.015,23.657 11.015,24.477 v1(11.049,24.511)
VBUS: D4.C D6.3 IC2.5 J1.A4_B9 J1.B4_A9 R12.1 R18.1 | length 59.4
  Top Layer w0.2: R18.1@35.533,31.458 v2@36.411,31.458
  Top Layer w0.5: IC2.5@35.159,34.417 v2(36.449,34.417) ; R18.1@35.444,31.369 R18.1@35.533,31.458 ; v2@36.411,31.458 v2(36.449,31.496) v2@36.449,31.55 ; v2(36.449,37.338) v2@36.449,37.284 ; J1.A4_B9@38.227,32.013 36.875,32.013 ; J1.B4_A9@38.227,36.813 36.867,36.813 ; v2@36.449,31.55 36.875,31.976 36.875,32.013 ; v2@36.449,31.55 v2(36.449,32.385) 36.503,32.385 36.875,32.013 ; v2@36.449,37.284 36.867,36.866 36.867,36.813 ; v2@36.449,37.284 v2(36.449,36.449) 36.503,36.449 36.867,36.813
  Bottom Layer w0.15: R12.1@9.158,26.358 9.158,28.97 13.462,33.274 17.145,33.274 18.288,34.417 18.288,36.957 19.431,38.1 24.257,38.1 30.226,32.131 D4.C@34.163,32.131
  Bottom Layer w0.5: D6.3@31.113,27.827 31.113,29.081 D4.C@34.163,32.131 35.76,32.131 ; v2(36.449,37.338) v2(36.449,36.449) v2(36.449,34.417) v2(36.449,32.385) ; 35.76,32.131 36.141,32.131 36.395,32.385 v2(36.449,32.385) ; 35.76,32.131 36.395,31.496 v2(36.449,31.496) v2(36.449,32.385)
VBUS_ADC: C14.1 R12.2 R14.1 U1.24 | length 4.4
  Top Layer w0.15: v1(11.049,25.4) 11.094,25.355 R14.1@11.938,25.355 12.059,25.234 U1.24@13.471,25.234
  Bottom Layer w0.15: R12.2@9.158,25.458 C14.1@10.16,25.458 10.189,25.429 11.02,25.429 v1(11.049,25.4)
VCAP1: C17.1 U1.48 | length 1.6
  Top Layer w0.15: U1.48@26.209,22.996 26.244,22.961 26.244,21.498 C17.1@26.278,21.463
VCAP2: C7.1 U1.73 | length 1.6
  Top Layer w0.15: U1.73@28.947,35.734 29.016,35.803 30.411,35.803 C7.1@30.48,35.872
pads on no net: D6.2 IC1.5 IC1.8 J1. J1.A8 J1.B8 J4.5 J4.6 J7.7 J7.8 J7.9 J20.1 J20.8 J20.14 J20.15 U1.7 U1.8 U1.9 U1.15 U1.18 U1.22 U1.23 U1.33 U1.34 U1.35 U1.36 U1.40 U1.42 U1.45 U1.53 U1.54 U1.57 U1.58 U1.59 U1.60 U1.61 U1.62 U1.65 U1.82 U1.83 U1.84 U1.85 U1.88 U1.90 U1.91 U1.97 U1.98 U2.7 U3.7 U4.2 U4.3 U4.9 U4.10 U4.11 U5.2 U5.3 U5.9 U5.10 U5.11

## Polygon pours and split planes (outlines as drawn)
GND on Bottom Layer "GND_L04_P000" (solid, pour order 0): 39.878,26.289 40.767,26.289 40.767,25.019 41.021,24.765 44.45,24.765 44.45,22.479 39.878,22.479
3V3 on 3V3 (split plane): 45.49,0.51 0.51,0.51 0.51,53.49 45.49,53.49
GND on GND (split plane): 45.49,0.51 0.51,0.51 0.51,53.49 45.49,53.49